# Altium PCB PCB1.PcbDoc
Units mil, origin at the board's own origin, x right, y up, seen from the top; angles counter-clockwise.
Board outline 730 x 1700 mil, 4 copper layers (Top Layer, VCC, GND, Bottom Layer), stack 23.756 mil thick; 25 components, 43 nets, 165 pads, 74 vias.
Unrouted connection lines stored in the file: 22.
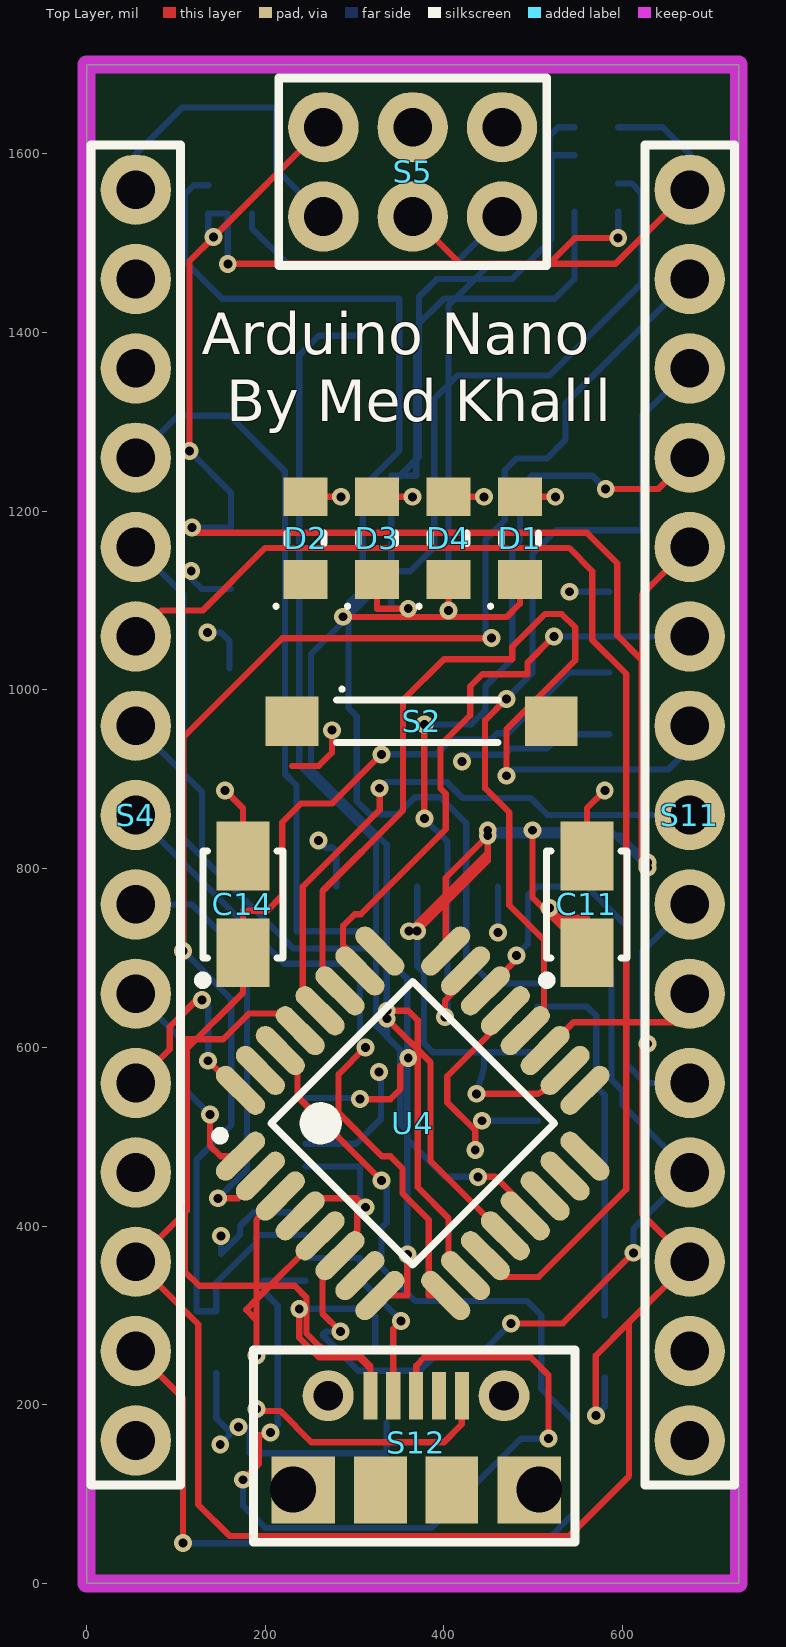
[diagram p0: Top Layer view]
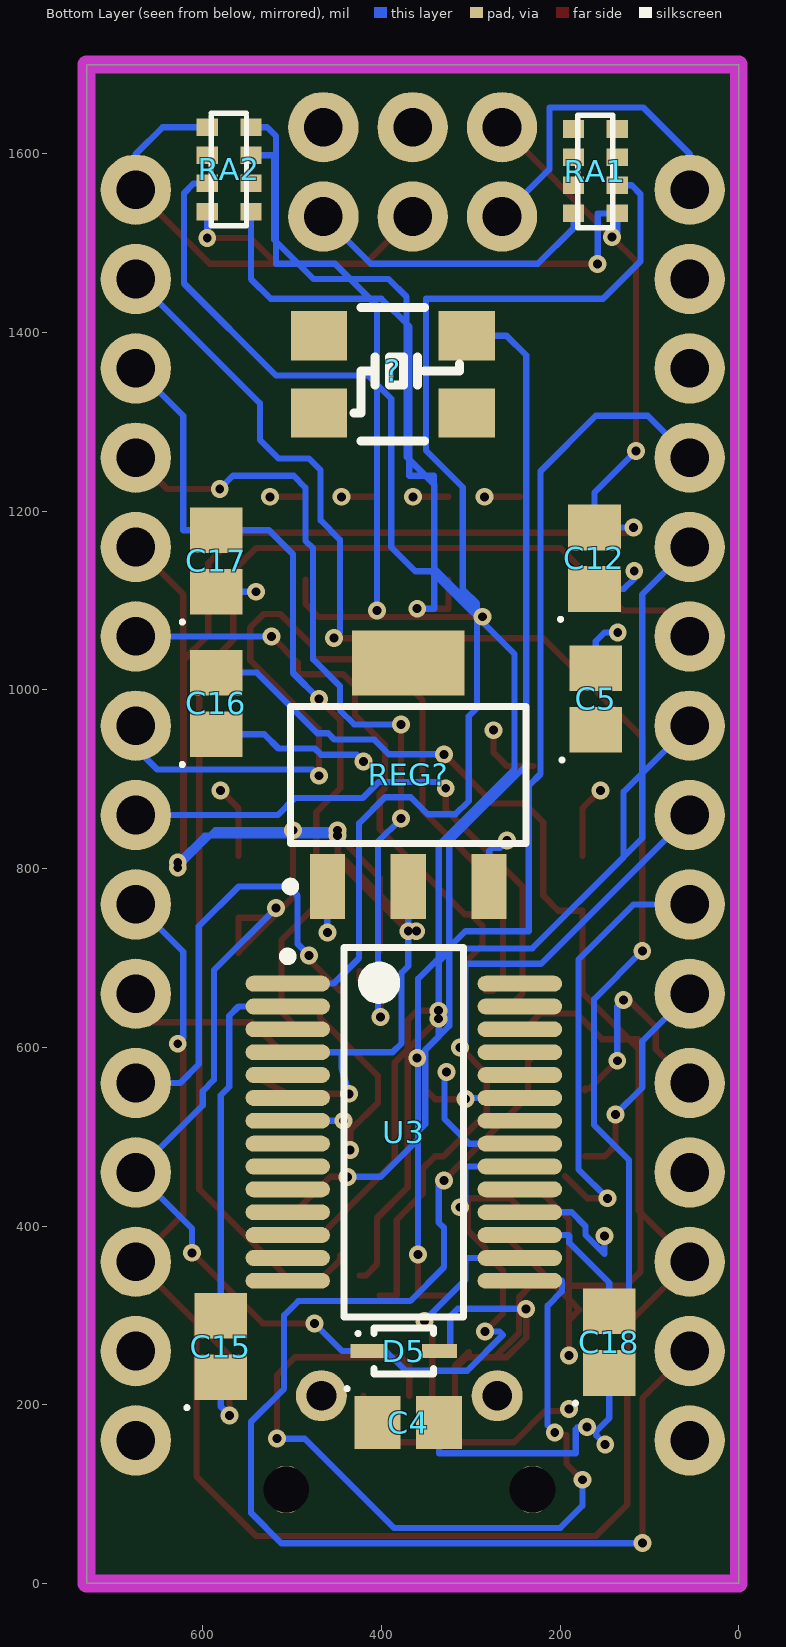
[diagram p1: Bottom Layer view, seen from below]
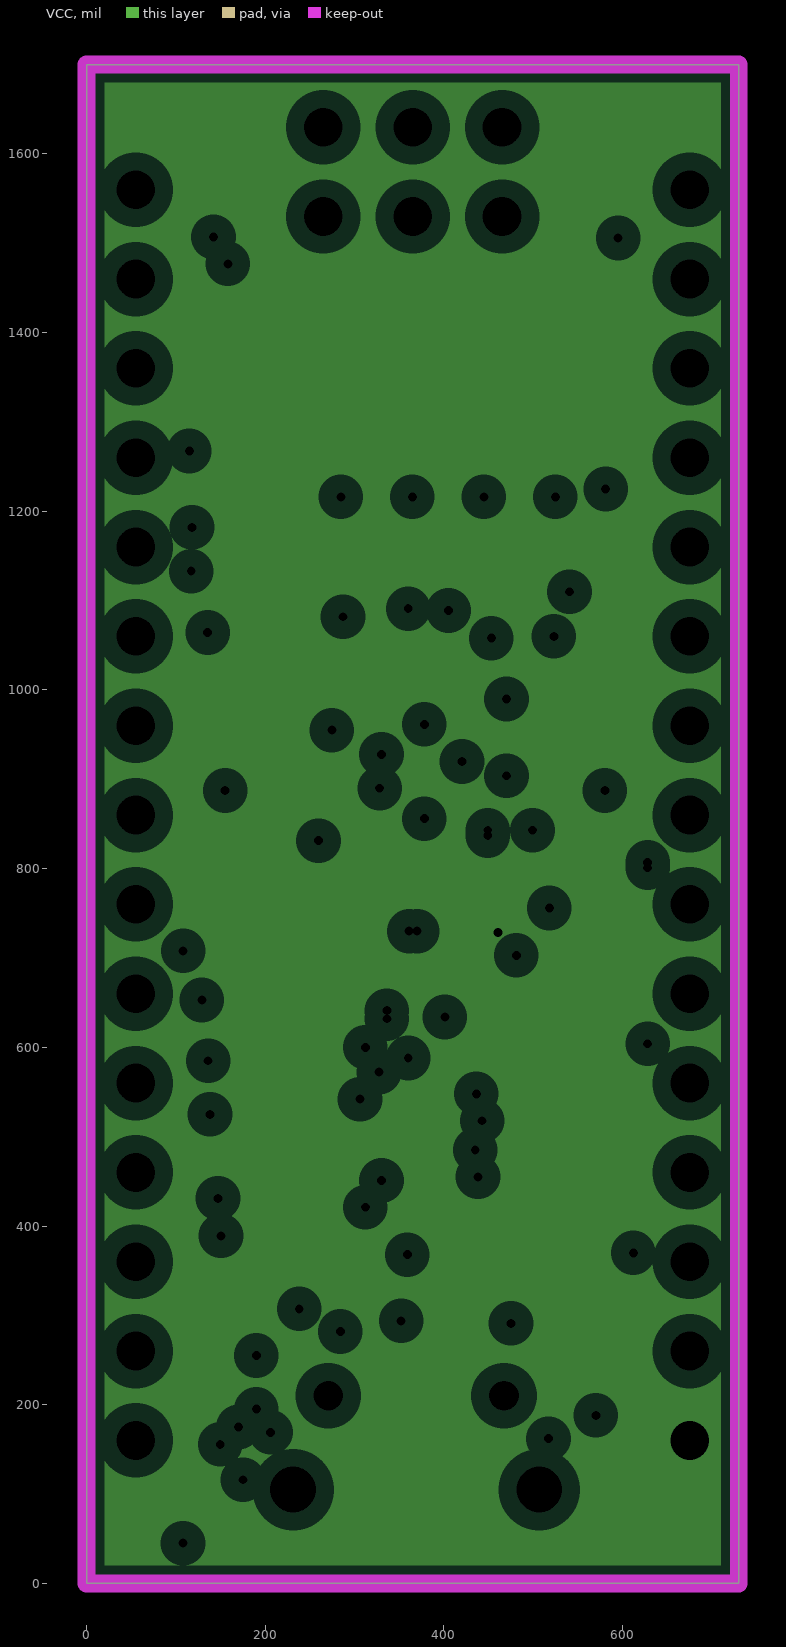
[diagram p2: VCC, clearances drawn from the general rule]
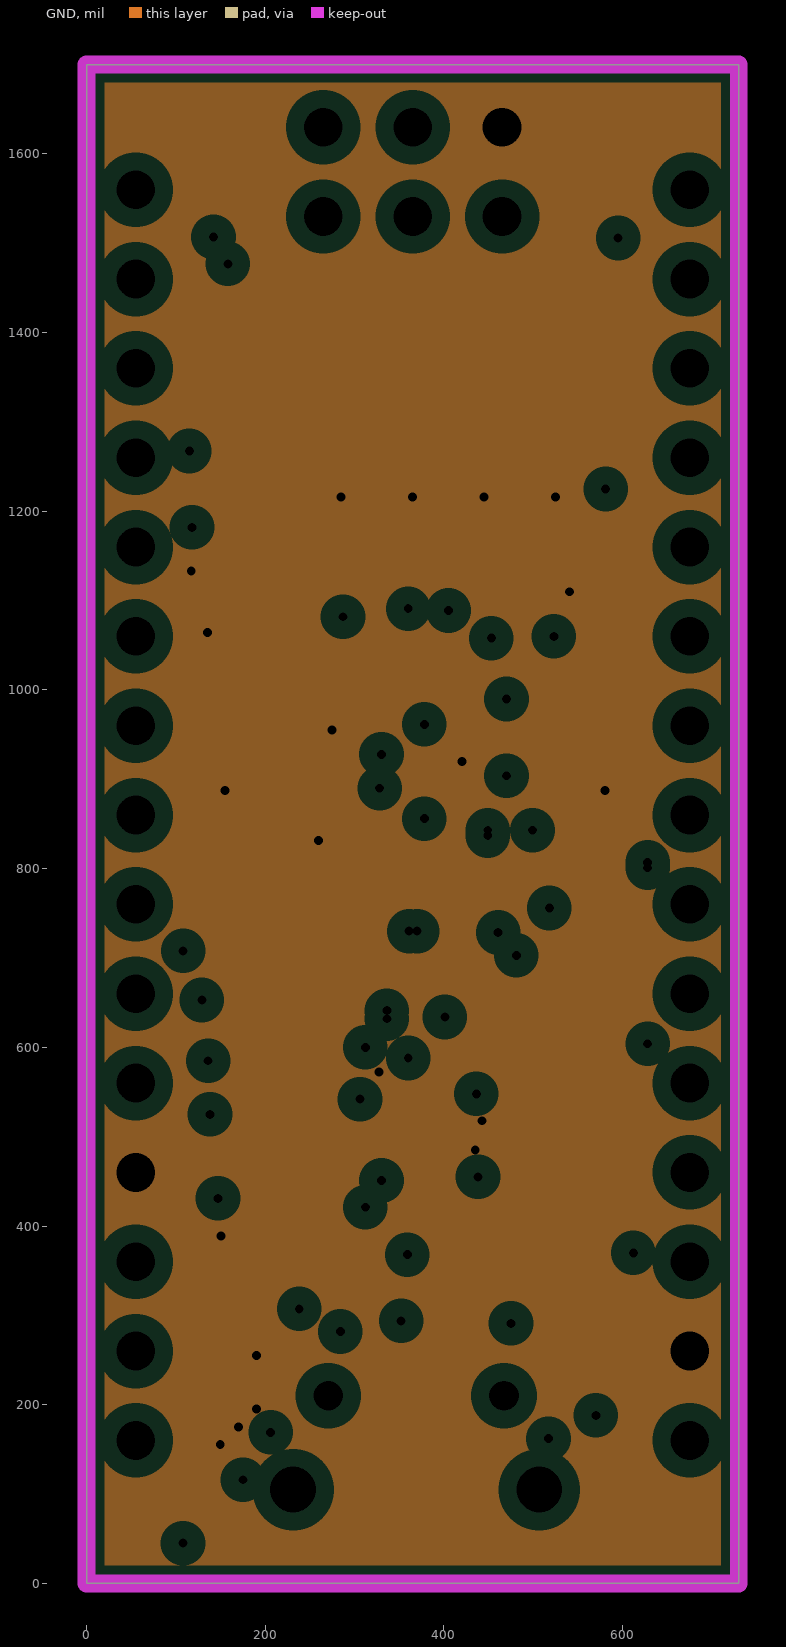
[diagram p3: GND, clearances drawn from the general rule]

## Layer stack, top to bottom
Top Solder: solder mask 0.4, Solder Resist, Dk 3.5
Top Layer: signal copper 1.4
Dielectric 2: prepreg 2.8, PP-006, Dk 4.1
VCC: plane copper 1.378, net Vin
Dielectric 1: dielectric 12.6, FR-4, Dk 4.8
GND: plane copper 1.378, net GND
Dielectric 3: prepreg 2.8, PP-006, Dk 4.1
Bottom Layer: signal copper 1.4
Bottom Solder: solder mask 0.4, Solder Resist, Dk 3.5

## Board outline
0,0 0,1700 730,1700 730,0

## Design rules (kind name [scope] priority, off if disabled: settings)
Clearance [All] p1: gap=10 ignorepadtopadclearanceinfootprint=FALSE
PlaneClearance [All] p1: clearance=20
PlaneConnect [All] p1: planeconnectstyle=Relief reliefexpansion=20 reliefentries=4 reliefconductorwidth=10 reliefairgap=10
PolygonConnect [All] p1: connectstyle=Relief reliefconductorwidth=10 reliefentries=4 polygonreliefangle="90 Angle" airgapwidth=10
RoutingVias [All] p1: holewidth=10 width=20 viastyle="Through Hole" minholewidth=10 minwidth=20 maxholewidth=10 maxwidth=20
SMDNeckDown [All] p1: percent=50.000
SolderMaskExpansion [All] p1: expansion=4 istentingtop=FALSE
SupplyNets "Schematic Supply Nets_5" [InNet('+5V')] p1: voltage=0.000
SupplyNets "Schematic Supply Nets_4" [InNet('VUSB')] p2: voltage=0.000
SupplyNets "Schematic Supply Nets_3" [InNet('3V3')] p3: voltage=0.000
SupplyNets "Schematic Supply Nets_2" [InNet('Vin')] p4: voltage=0.000
SupplyNets "Schematic Supply Nets_1" [InNet('BLED')] p5: voltage=0.000
SupplyNets "Schematic Supply Nets" [InNet('GND')] p6: voltage=0.000
Width [All] p1: maxlimit=7 minlimit=7 preferedwidth=7 minimp=50.000000 maximp=50.000000 favimp=50.000000
28 further rules are at their usual default settings.

## Components (designator, comment, footprint, x,y, rotation, side; value= is the part's Value field where it differs from the comment)
? "Aker 16MHz Crystal SMT" "Aker S5C Crystal" 470,1310 r0 bottom value=16MHz
C4 "C0805C180J5GACTU" CAPCP2012X09N 370,180 r180 bottom
C5 "C0805C180J5GACTU" CAPCP2012X09N 160,990 r90 bottom
C11 "Capacitor SMT Tantalum" "CASE A - 3216X18" 560,760 r90 top value=4.7µF
C12 "100nF Ceramic Multilayer Capacitor_1" CAPCP2012X09N 161.59,1147.55 r90 bottom
C14 "Capacitor SMT Tantalum" "CASE A - 3216X18" 175,760 r90 top value=4.7µF
C15 "C0805C180J5GACTU" CAPCP2012X09N 580,265 r90 bottom
C16 "100nF Ceramic Multilayer Capacitor_1" CAPCP2012X09N 585,985 r90 bottom
C17 "100nF Ceramic Multilayer Capacitor_1" CAPCP2012X09N 585,1144.45 r90 bottom
C18 "100nF Ceramic Multilayer Capacitor_1" CAPCP2012X09N 145,270 r90 bottom
D1 "Kingbright Blue LED, 60 mcd 120 ° 0805" LED1913X12NBLUE 485,1170 r90 top
D2 "Kingbright Red LED, 100 mcd 120 ° 0805" LED1913X12NRED 245,1170 r90 top
D3 "Kingbright Green LED, 70 mcd 120 ° 0805" LED1913X12NGREEN 325,1170 r90 top
D4 "Kingbright Orange LED, 200 mcd 120 ° 0805" LED1913X12NYEL/ORANGE 405,1170 r90 top
D5 "Panasonic DB2J20900L Schottky Diode, 0.5A, 20V, 2.4ns, 2-Pin SMini2 F5 B" DIOM1712X07N 375,260 r180 bottom
RA1 "1k +- 5% SMT Resistor Array" "1206 RA" 180,1533.5 r90 bottom
RA2 "680+- 5% SMT Resistor Array" "1206 RA" 590,1535.51 r90 bottom
REG? "" SOT230P700X180-4N 370,905 r90 bottom
S2 "Button Tactile Switch, NO 0.05 A 0.8mm" Button8014X17N 370,965 r0 top
S4 "connector;str header;single row;.1 cont centers;.095 tail;gold or gtx;36 contact" Header 55,160 r90 top
S5 "Programming Headers Dual Row" "ISP HEADER" -430,2085 r0 top
S11 "connector;str header;single row;.1 cont centers;.095 tail;gold or gtx;36 contact" Header 675,160 r90 top
S12 "NewMolex Right Angle SMT Female Type B Micro USB Connector, 30 V ac, 1.8A" MicroUSB 320.39,210 r0 top
U3 "FT232RL, Universal Asynchronous Receiver & Transmitter 3MBd, 28-Pin, SSOP" SOP65P780X200-28N 375,505 r180 bottom
U4 "ATMEGA328P-AU" TQFP80P900X900X120-32N 365,515 r45 top

## Footprints (in the part's own frame and the unit in brackets; to place one, negate y for a bottom-side part, rotate by r counter-clockwise, add the part's x,y. Pads: shape width x height; smd on the part's side, far side on the other; paste and mask are expansions set on the pad)
"1206 RA" [mm]
  rect 0.5x0.6 smd: 1(0,0.127) 2(0.8,0.127) 3(1.6,0.127) 4(2.4,0.127) 5(0,-1.118) 6(0.8,-1.118) 7(1.6,-1.118) 8(2.4,-1.118)
  silkscreen extent -0.41,-0.99 2.79,0.01, body extent -0.41,-1.31 2.79,0.29, height 0.5
"Aker S5C Crystal" [mm]
  rect 1.6x1.4 smd: 1(0,0) 2(-4.2,0) 3(0,-2.2) 4(-4.2,-2.2)
  round 0.254 on Bottom Overlay: 5(-3,-2.4)
  silkscreen extent -4,-3 -1,0.8, body extent -4.7,-2.8 0.5,0.6, height 1
Button8014X17N [mm] "Chip Inductor, 2-Leads, Body 8.00x1.40mm, IPC Medium Density"
  rect 1.5x1.4 smd: 1(-3.556,0) 2(3.81,0)
  silkscreen extent -2.3,-0.6 2.3,0.96, body extent -3.79,-1.92 4.21,1.78, height 2.5
CAPCP2012X09N [mm] "Chip Capacitor, 2-Leads, Body 2.00x1.25mm, IPC Medium Density"
  rect 1.3x1.5 smd: 1(-0.875,0) 2(0.875,0)
  silkscreen extent -1.79,0.91 -1.69,1.01, body extent -1.05,-0.57 0.95,0.68, height 0.78
"CASE A - 3216X18" [mm] "Molded Capacitor, 2-Leads, Body 3.2x1.6mm, IPC Medium Density"
  rect 1.95x1.5 smd: 1(-1.375,0) 2(1.375,0)
  silkscreen extent -2.28,-1.14 1.52,1.27, body extent -1.52,-0.76 1.65,0.84, height 1.77
DIOM1712X07N [mm] "Molded Diode, 2-Leads, Body 1.70x1.25mm, IPC Medium Density"
  rect 1x0.4 smd: 1(-1.016,0) 2(1.016,0)
  silkscreen extent -1.35,-0.65 0.85,0.65, body extent -0.9,-0.45 0.9,0.45, height 0.8
Header [mm] "SIL Header"
  round 2 hole 1.1: 1(0,0) 2(2.54,0) 3(5.08,0) 4(7.62,0) 5(10.16,0) 6(12.7,0) 7(15.24,0) 8(17.78,0) 9(20.32,0) 10(22.86,0) 11(25.4,0) 12(27.94,0) 13(30.48,0) 14(33.02,0) 15(35.56,0)
  silkscreen extent -1.27,-1.27 36.83,1.27, body extent -1.33,-1.35 36.93,1.35, height 8.6
"ISP HEADER" [mm] "SIL Header for programming"
  round 2 hole 1.1: 1(17.653,-14.097) 2(17.653,-11.557) 3(20.193,-14.097) 4(20.193,-11.557) 5(22.733,-14.097) 6(22.733,-11.557)
  silkscreen extent 16.38,-15.49 24,-10.16, body extent 16.38,-15.37 24,-10.29, height 8
LED1913X12NBLUE [mm] "LED 2-Leads, Body 1.90x1.32mm, IPC Medium Density"
  rect 1.1x1.25 smd: 1(-1.175,0) 2(1.175,0)
  silkscreen extent -1.99,-0.53 0.15,0.89, body extent -1,-0.62 1.02,0.62, height 1.1
LED1913X12NGREEN [mm] "LED 2-Leads, Body 1.90x1.32mm, IPC Medium Density"
  rect 1.1x1.25 smd: 1(-1.175,0) 2(1.175,0)
  silkscreen extent -1.99,-0.53 0.15,0.89, body extent -1.01,-0.62 1.01,0.63, height 1.1
LED1913X12NRED [mm] "LED 2-Leads, Body 1.90x1.32mm, IPC Medium Density"
  rect 1.1x1.25 smd: 1(-1.175,0) 2(1.175,0)
  silkscreen extent -1.99,-0.53 0.15,0.89, body extent -1.02,-0.43 1.04,0.47, height 0.85
LED1913X12NYEL/ORANGE [mm] "LED 2-Leads, Body 1.90x1.32mm, IPC Medium Density"
  rect 1.1x1.25 smd: 1(-1.175,0) 2(1.175,0)
  silkscreen extent -1.99,-0.53 0.15,0.89, body extent -1.01,-0.62 1.01,0.63, height 1.1
MicroUSB [mm] "MicroUSB  Molex 5Pin"
  rect 0.4x1.35 smd: 1(-0.07,0) 2(0.58,0) 3(1.23,0) 4(1.88,0) 5(2.53,0)
  rrect50% 0.6x1.3 hole 1.3: ""(-2.27,-2.667) ""(-2.27,-2.667) ""(4.73,-2.667)
  rect 1.8x1.9 smd: ""(-1.98,-2.678) ""(4.45,-2.678)
  round 1.45 hole 0.85: ""(-1.27,0) ""(3.73,0)
  rect 1.5x1.9 smd: ""(0.218,-2.678) ""(2.242,-2.678)
  silkscreen extent -3.39,-4.17 5.75,1.3, body extent -2.83,-5.32 5.37,0.11, height 2.68
SOP65P780X200-28N [mm] "SOP, 28-Leads, Body 10.20x5.30mm, Pitch 0.65mm, IPC Medium Density"
  oval 2.4x0.45 smd: 1(-3.3,4.225) 2(-3.3,3.575) 3(-3.3,2.925) 4(-3.3,2.275) 5(-3.3,1.625) 6(-3.3,0.975) 7(-3.3,0.325) 8(-3.3,-0.325) 9(-3.3,-0.975) 10(-3.3,-1.625) 11(-3.3,-2.275) 12(-3.3,-2.925) 13(-3.3,-3.575) 14(-3.3,-4.225) 15(3.3,-4.225) 16(3.3,-3.575) 17(3.3,-2.925) 18(3.3,-2.275) 19(3.3,-1.625) 20(3.3,-0.975) 21(3.3,-0.325) 22(3.3,0.325) 23(3.3,0.975) 24(3.3,1.625) 25(3.3,2.275) 26(3.3,2.925) 27(3.3,3.575) 28(3.3,4.225)
  silkscreen extent -3.43,-5.25 1.7,5.25, body extent -3.91,-5.1 3.91,5.1, height 2
SOT230P700X180-4N [mm] "SOT223, 4-Leads, Body 6.50x7.00mm (avg), Pitch 2.30mm, IPC Medium Density"
  rect 1.85x1 smd: 1(-3.175,2.3) 2(-3.175,0) 3(-3.175,-2.3)
  rect 1.85x3.2 smd: 4(3.175,0)
  silkscreen extent -3.3,-3.35 1.95,3.48, body extent -3.8,-3.12 3.29,3.38, height 1.65
TQFP80P900X900X120-32N [mm] "TQFP, 32-Leads, Body 7.00x7.00mm, Pitch 0.80mm, IPC Medium Density"
  oval 1.75x0.55 smd: 1(-4.125,2.8) 2(-4.125,2) 3(-4.125,1.2) 4(-4.125,0.4) 5(-4.125,-0.4) 6(-4.125,-1.2) 7(-4.125,-2) 8(-4.125,-2.8) 17(4.125,-2.8) 18(4.125,-2) 19(4.125,-1.2) 20(4.125,-0.4) 21(4.125,0.4) 22(4.125,1.2) 23(4.125,2) 24(4.125,2.8)
  oval 0.55x1.75 smd: 9(-2.8,-4.125) 10(-2,-4.125) 11(-1.2,-4.125) 12(-0.4,-4.125) 13(0.4,-4.125) 14(1.2,-4.125) 15(2,-4.125) 16(2.8,-4.125) 25(2.8,4.125) 26(2,4.125) 27(1.2,4.125) 28(0.4,4.125) 29(-0.4,4.125) 30(-1.2,4.125) 31(-2,4.125) 32(-2.8,4.125)
  silkscreen extent -4.25,-2.85 2.85,3.75, body extent -4.44,-4.5 4.56,4.5, height 1.6

## Part data
?: library part "Aker  C5S-16.000-12-3030-X", "Aker S5C SMT Crystal", Frequency Stability=+/-30ppm, Load Capacitance=12pF, Manufacturer=Aker, Manufacturer Part #=C5S-16.000-12-3030-X, Package="3.2x5mm SMD", Creator="R Kanjee", HelpURL=http://za.rs-online.com/web/p/crystal-units/6719488/, RS="RS 671-9488", RS Stock Nr.=671-9488, Supplier=RS
C4 C5: library part "18pF Ceramic Multilayer Capacitor, 50 V dc C0G Dielectric ±5% SMD", "18pF Ceramic Multilayer Capacitor, 50 V dc C0G Dielectric ±5% SMD", Capacitance=15pF, Manufacturer=Kemet, Package=0805, Voltage=50V, Creator="Ritesh Kanjee", Datasheet URL=http://za.rs-online.com/web/p/ceramic-multilayer-capacitors/6480935/?searchTerm=C0805C180J5GACTU&relevancy-data=636F3D3226696E3D4931384E4B6E6F776E41734D504E266C753D656E266D6D3D6D61746368616C6C7061727469616C26706D3D5E5B5C707B4C7D5C707B4E647D2D2C2F255C2E5D2B2426706F3D313326736E3D592673743D4D414E5F504152545F4E554D4245522677633D424F5448267573743D4330383035433138304A35474143545526, Date Created="18 February 2015", RS Stock No.=648-0935
C11 C14: library part "4.7µF Tant RS 496-3545", "Capacitor,tantalum,SMT,16V,4.7uF,10%,A-case", Package=3216-18, Tolerance=10%, Voltage=16V, ComponentLink1Description="Supplier Website", ComponentLink1URL=http://za.rs-online.com/web/search/searchBrowseAction.html?method=getProduct&R=4963545, ComponentLink2Description="RS Data sheet", ComponentLink2URL=http://docs-europe.origin.electrocomponents.com/webdocs/04ed/0900766b804ed4cc.pdf, LatestRevisionDate=28-April-2010, Part Originator="H Theron", Publisher=DPSS, RS Stock Nr.=496-3545
C12 C16 C17 C18: "AVX 0805 Standard 100nF Ceramic Multilayer Capacitor, 50 V dc X7R Dielectric ±10% SMD", Capacitance=100nF, Manufacturer=AVX, Package=0805, Voltage=50V, Creator="Ritesh Kanjee", Datasheet URL=http://za.rs-online.com/web/p/ceramic-multilayer-capacitors/4646688/, Date Created="18 February 2015", RS Stock No.=464-6688
C15: library part "18pF Ceramic Multilayer Capacitor, 50 V dc C0G Dielectric ±5% SMD", "18pF Ceramic Multilayer Capacitor, 50 V dc C0G Dielectric ±5% SMD", Capacitance=18pF, Manufacturer=Kemet, Package=0805, Voltage=50V, Creator="Ritesh Kanjee", Datasheet URL=http://za.rs-online.com/web/p/ceramic-multilayer-capacitors/6480935/?searchTerm=C0805C180J5GACTU&relevancy-data=636F3D3226696E3D4931384E4B6E6F776E41734D504E266C753D656E266D6D3D6D61746368616C6C7061727469616C26706D3D5E5B5C707B4C7D5C707B4E647D2D2C2F255C2E5D2B2426706F3D313326736E3D592673743D4D414E5F504152545F4E554D4245522677633D424F5448267573743D4330383035433138304A35474143545526, Date Created="18 February 2015", RS Stock No.=648-0935
D1: Color=Blue, Forward Voltage=3.2V, Manufacturer=KingBright, Manufacturer Part No.=KP-2012PBC-A, Creator="Ritesh Kanjee", Datasheet URL=http://za.rs-online.com/web/p/visible-leds/4663784/, Date Created="18 February 2015", RS Stock No.=466-3784
D2: Color=RED, Forward Voltage=1.85V, Manufacturer=KingBright, Manufacturer Part No.=KP-2012SRC-PRV, Creator="Ritesh Kanjee", Datasheet URL=http://za.rs-online.com/web/p/visible-leds/4663813/, Date Created="18 February 2015", RS Stock No.=466-3813
D3: Color=Green, Forward Voltage="2.1 V", Manufacturer=KingBright, Manufacturer Part No.=KP-2012MGC, Creator="Ritesh Kanjee", Datasheet URL=http://za.rs-online.com/web/p/visible-leds/4663778/, Date Created="18 February 2015", RS Stock No.=466-3778
D4: Color=Orange, Forward Voltage=1.85V, Manufacturer=KingBright, Manufacturer Part No.=KP-2012SEC, Creator="Ritesh Kanjee", Datasheet URL=http://za.rs-online.com/web/p/visible-leds/4663790/, Date Created="18 February 2015", RS Stock No.=466-3790
D5: library part "Schottky Diode, 0.5A, 20V, 2.4ns, 2-Pin SMini2 F5 B", Manufacturer=Panasonic, Manufacturer Part No.=DB2J20900L, Maximum Continuous Forward Current=0.5A, Peak Reverse Repetitive Voltage=20V, Created By="R Kanjee", Datasheet=http://docs-europe.electrocomponents.com/webdocs/1398/0900766b813986b3.pdf, Date Created="1 March 2015", RS Stock No.=713-2703
RA1: "1k +- 5% SMT Resistor Array 4 Res", Manufacturer=Bourns, Manufacturer Part No.=CAY16-102J4LF, Creator="R Kanjee", Date Created="25 February 2015", RS Stock No.=552-5579, Wattage=0.25W
RA2: library part "680 +- 5% SMT Resistor Array 4 Res 1206", "680 +- 5% SMT Resistor Array 4 Res 1206", Manufacturer=Bourns, Manufacturer Part No.=CAY16-681J4LF, Creator="R Kanjee", Date Created="25 February 2015", RS Stock No.=552-5579, Wattage=0.25W
REG?: library part LM1117MP-5.0, "LM1117MP-5.0/NOPB, Low Dropout Voltage Regulator, 1.5A, 5 V ±1%, 4-Pin SOT-223", Manufacturer="Texas Instruments", Maximum Input Voltage=15V, Output Voltage=5V, Supply Current=1.5Amps, Created By="R Kanjee", Datasheet URL=http://za.rs-online.com/web/p/low-dropout-voltage-regulators/5339583/, Date Created="26 February 2015", RS Stock No.=533-9583
S2: Manufacturer="C & K", Manufacturer Part No.=B3F1000, Creator="R Kanjee", Date Created="25 February 2015", RS Stock No.=516-255, State="Normaly Open"
S4 S11: library part "Single row; PCB headers", Current Rating="3Amps Continuous", Manufacturer=FCI, Manufacturer Part No.=68000-236HLF, Created By="R Kanjee", Date Created="1 March 2015", RS Stock No.=2509565626
S5: library part "Programming ISP, Programming Headers Dual Row", Current Rating="3Amps Continuous", Manufacturer=FCI, Manufacturer Part No.=68000-236HLF, Created By="R Kanjee", Date Created="1 March 2015", RS Stock No.=2509565626
S12: library part "Micro USB Connector, 30 V ac, 1.8A", Manufacturer=Molex, Manufacturer Part No.=105017-0001, Max Current=1.8A, Max Voltage=30V, Creator="R Kanjee", Datasheet URL=http://za.rs-online.com/web/p/micro-usb-connectors/8486764/, Date Created="28 February 2015", RS Stock No=848-6764
U3: library part "FT232RL USB to UART, Universal Asynchronous Receiver & Transmitter 3MBd, 28-Pin, SSOP", Manufacturer="FTDI Chip", Manufacturer Part No.=FT232RL, Creator="R Kanjee", Date Created="03 March 2015", Pin Count=28, RS Stock No.=406-580
U4: "ATMEGA328P-AU, 8 bit AVR Microcontroller 20MHz 1 kB, 32 kB Flash, 2 kB RAM, I2C 32-Pin TQFP", Company="Lumina Inova", Created By="Ritesh Kanjee", Datasheet URL=http://docs-europe.electrocomponents.com/webdocs/0db4/0900766b80db4deb.pdf, Date Created="14 February 2015", RS Stock No.=696-3092

## Via types
v1: diameter 20, hole 10, Top Layer to Bottom Layer, 74 vias

## Nets (pads, with @x,y where several pads share a name; then routed paths per layer and width w, separated by ;. In a path a pad name is that pad's centre, name@x,y a point inside that pad or via, vN(x,y) a via of type N, cw(c..) or ccw(c..) an arc to the next point about the centre after c; other vN are vias at no path point)
3V3: C18.2 S11.14 U3.17 | length 1771.9
  Top Layer w7: v1(108,708) 108,947 219,1058 v1(453,1058)
  Bottom Layer w7: v1(108,708) 162,654 162,513 123,474 123,304.45 C18.2 145,336.26 189.78,381.05 189.78,388.78 190.84,389.84 U3.17 ; v1(453,1058) 446.49,1064.51 446.49,1168.39 468.11,1190 468.11,1246.12 481,1259.01 515.01,1259.01 536,1280 536,1321 S11.14
A0: S11.12 U4.23 | length 956.8
  Top Layer w7: v1(378,856) v1(378,961.5) ; v1(401,634) 401,652.22 424.16,675.38 U4.23 ; v1(581,1225) 640,1225 S11.12
  Bottom Layer w7: v1(378,856) 404,830 404,637 v1(401,634) ; v1(378,961.5) 430.5,961.5 446.49,977.49 446.49,1004.49 476.5,1034.5 476.5,1158.54 485.11,1167.14 485.11,1226.61 498.26,1239.76 566.24,1239.76 v1(581,1225)
A1: S11.11 U4.24 | length 717.6
  Top Layer w7: U4.24 401.89,789.89 v1(449,837) ; v1(628,807) 622,813 622,1107 S11.11
  Bottom Layer w7: v1(449,837) 598,837 v1(628,807)
A2: S11.10 U4.26 | length 670.7
  Top Layer w7: U4.26 305.84,695.65 287,714.49 287,736 300,749 307,749 402,844 402,884 396,890 396,938 429.5,971.5 429.5,1004 443,1017.5 493.5,1017.5 493.5,1030.5 v1(523,1060)
  Bottom Layer w7: v1(523,1060) S11.10
A3: S11.9 U4.27 | length 1063.7
  Top Layer w7: U4.27 275.11,663.24 264,674.35 264,775 354,865 354,988.5 400,1034.5 476.5,1034.5 476.5,1048.5 513,1085 532,1085 547,1070 547,1033.06 470,956.06 v1(470,904)
  Bottom Layer w7: v1(470,904) 477.02,911.02 651,911.02 675,935.02 S11.9
A4: S11.8 U4.28 | length 657.9
  Top Layer w7: U4.28 242,660.27 242,780 328,866 v1(328,890)
  Bottom Layer w7: v1(328,890) 335,897 403.04,897 420.93,879.11 496.89,879.11 516,860 S11.8
A5: C15.1 RA1.1 S4.3 S5.5 S11.3 S11.7 U4.29 | length 2464.4
  Top Layer w7: U4.29 239.03,620.97 222,638 182,638 153,609 112,609 112,417 S4.3 124.87,290.13 124.87,88.13 160,53 540,53 607.08,120.08 607.08,292.08 ; v1(570,188) 570,255 607.08,292.08 ; v1(628,604) 622,598 622,413 S11.3 607.08,292.08
  Bottom Layer w7: RA1.1 185,1517 225,1477 412,1477 S5.5 ; v1(570,188) 580,198 C15.1 ; v1(628,604) 622,610 622,707 S11.7
A6: S11.6 U4.19 | length 206.7
  Top Layer w7: U4.19 545,628.19 675,628.19 S11.6
A7: S11.5 U4.22 | length 493.2
  Top Layer w7: U4.22 481,697.81 v1(481,703)
  Bottom Layer w7: v1(481,703) 494,716 494,770 504,780 560,780 604.5,735.5 604.5,581 625.5,560 S11.5
AREF: C17.2 S11.13 U4.20 | length 928.5
  Top Layer w7: v1(470,990) 446,966 446,890 473,863 473,759 512,720 512,639.73 U4.20
  Bottom Layer w7: v1(470,990) 499,1019 499,1152 525.9,1178.9 C17.2 622,1178.9 622,1307 S11.13
BLED: C11.1 C12.2 D5.1 RA1.5 RA2.1 REG?.2 S5.2 S11.4 U3.4 U3.20 U4.4 U4.6 U4.18 | length 4504.9
  Top Layer w7: v1(115,1267.59) 115,1480 v1(142,1507) S5.2 ; v1(118,1182) 118,1176 560,1176 594,1142 594,1061.13 621,1034.13 621,801 v1(628,801) ; v1(158,1477) 518,1477 547,1506 v1(595,1506) ; U4.4 239.03,414.03 256,431 302,431 303,430 ; v1(284,282) 264,302 264,350 272,358 283.57,358 U4.6 283.57,375 303,394.43 303,430 ; v1(312,421) 303,430 ; v1(361,730) 449,818 ; v1(370,730) 449,809 449,818 ; v1(436.19,548) 504.98,548 535.51,564.02 U4.18 ; v1(449,843) 449,818 ; v1(475,291) 533,291 v1(612,370) ; v1(499,843) 499,768 C11.1@560,707 ; v1(518,756) 529,745 560,745 C11.1@560,707 ; C11.1 C11.1@560,707
  Bottom Layer w7: v1(115,1267.59) 161.59,1221 C12.2 v1(118,1182) ; v1(142,1507) 136,1513 RA1.5 158,1533.5 v1(158,1477) ; U3.20 306,466.61 306,427 v1(312,421) ; v1(284,282) 268,282 264,278 304,238 373,238 395,260 D5.1 444,260 v1(475,291) ; v1(361,730) v1@370,739 ; REG?.2 v1@370,739 ; v1(436.19,548) 444.77,576.87 444.77,594.57 ; v1(449,843) v1(499,843) 586,843 v1(628,801) ; U3.4 444.77,594.57 ; v1(518,756) 587.5,686.5 587.5,563.5 600,551 600,535 S11.4 612,397 v1(612,370) ; v1(595,1506) RA2.1 ; v1@370,739 v1(370,730) 370,691 377.5,683.5 377.5,604.71 387.64,594.57 444.77,594.57
D0/RX: RA1.2 S4.2 U4.30 | length 1425.2
  Top Layer w7: S4.2 107.87,207.13 v1(107.87,45) ; U4.30 216.76,596 224,596 236,584 236,545 v1(330,451)
  Bottom Layer w7: v1(107.87,45) 512,45 546,79 546,181 509,218 509,300 493,316 368,316 330,354 330,397.97 335.82,403.8 335.82,444.97 330,450.8 v1(330,451)
D1/TX: RA1.3 S4.1 U4.31
D2: S4.5 U4.32 | length 249.2
  Top Layer w7: S4.5 93,598 93,623 123,653 v1(129,653) ; v1(136,585) 167,554 172.22,554 U4.32
  Bottom Layer w7: v1(129,653) 136,646 v1(136,585)
D3: S4.6 U4.1 | length 243.5
  Top Layer w7: v1(138,525) 138,490.11 150,478.11 U4.1
  Bottom Layer w7: S4.6 108,607 108,555 v1(138,525)
D4: S4.7 U4.2 | length 488.4
  Top Layer w7: v1(147,431) 169.65,431 U4.2
  Bottom Layer w7: S4.7 117.5,760 179.5,698 179.5,463.5 v1(147,431)
D5: S4.8 U4.9 | length 772.5
  Top Layer w7: v1(312,600) 282,570 282,526.5 330.55,477.95 340,477.95 353.5,464.45 353.5,436.46 383,406.96 383,322.22 U4.9
  Bottom Layer w7: S4.8 221.3,693.7 306,693.7 306,606 v1(312,600)
D6: S4.9 U4.10 | length 839.1
  Top Layer w7: v1(336,641) 360,641 370.5,630.5 370.5,443.5 405,409 405,357 417.51,344.49 U4.10
  Bottom Layer w7: S4.9 129,886 129,812.96 231.26,710.7 321.3,710.7 336,696 v1(336,641)
D7: S4.10 U4.11 | length 1481.6
  Top Layer w7: S4.10 84,1089 130,1089 200,1159 540,1159 566,1133 566,1056 604,1018 604,441 506,343 465,343 446.43,361.57 U4.11
D8: S4.11 U4.12 | length 995.1
  Top Layer w7: v1(336,632) 385,583 385,472.73 U4.12
  Bottom Layer w7: S4.11 108,1107 108,833.96 231.26,710.7 321.3,710.7 336,696 v1(336,632)
D9: S4.12 U4.13 | length 1231.9
  Top Layer w7: v1(438,455) 457.41,455 490.97,421.44 U4.13
  Bottom Layer w7: S4.12 102,1307 160,1307 222,1245 222,906 235,893 235,730 306,730 359,677 359,497 401,455 v1(438,455)
D10: S4.13 U4.14
D11/MOSI: S4.14 S5.4 U4.15
D12/MISO: S4.15 S5.1 U4.16 | length 362.5
  Bottom Layer w7: S4.15 55,1600 107,1652 212,1652 212,1583 S5.1
D13/SCK: RA2.4 S5.3 S11.15 | length 498.8
  Top Layer w7: S5.3 418,1477 592,1477 S11.15
  Bottom Layer w7: RA2.4 645,1630 675,1600 S11.15
GLED: RA2.3 U3.22
GND: C4.2 C5.2 C11.2 C12.1 C14.2 C16.1 C17.1 C18.1 D1.2 D2.2 D3.2 D4.2 REG?.3 S2.1 S4.4 S5.6 S11.2 S12.5 U3.7 U3.18 U3.21 U4.3 U4.5 U4.21 | length 2275.9
  Top Layer w7: v1(155,887.52) 175,867.52 C14.2 ; v1(190,195) 190,192.98 216.52,192.98 251.54,157.96 400,157.96 420,177.96 S12.5 ; v1(190,255) 190,294.73 ; U4.3 190,406.81 190,317.73 ; 230,915 260,915 274.53,929.53 v1(274.53,955) ; D2.2 v1(284.61,1216.26) ; U4.5 190,317.73 ; D3.2 v1(364.61,1216.26) ; D4.2 v1(444.61,1216.26) ; v1(435,485) 435,507 403.76,538.24 403.76,567.8 468.7,632.74 U4.21 ; D1.2 v1(524.61,1216.26) ; C11.2 560,867.52 v1(580,887.52) ; 190,294.73 190,317.73 ; 190,294.73 178.5,306.23 190,317.73
  Bottom Layer w7: v1(117.06,1133.11) 117.06,1124.75 128.7,1113.11 C12.1 ; v1(135.47,1064.45) 150,1064.45 160,1054.45 C5.2 ; C18.1 145,184.96 159.59,170.36 159.59,165.62 v1(149.53,155.55) ; v1(150.46,389) 150.46,369 171.66,390.21 171.66,400 187.1,415.43 U3.18 ; v1(170,175) 180,175 182.44,172.56 182.44,145.5 335.55,145.5 C4.2 ; U3.21 301.7,492.2 329.5,520 329.5,570.03 v1(327.32,572.2) ; v1(259.45,831.42) 267.34,823.53 275.92,823.53 279.45,820 REG?.3 ; v1(420.1,920) 427.6,927.5 467.6,927.5 474.6,934.5 515.23,934.5 531.29,950.55 C16.1 ; v1(442.68,517.8) U3.7 ; v1(540.47,1110) C17.1
Net?_2: ?.2 C4.1
Net?_3: ?.3 C5.1
NetC15_2: C15.2 U3.2 | length 409.7
  Bottom Layer w7: U3.2 560,645.75 570.5,635.25 570.5,556 580,546.5 C15.2
NetD1_1: D1.1 RA2.5 | length 881.3
  Top Layer w7: v1(287,1082) 287.4,1081.6 470,1081.6 485,1096.6 D1.1
  Bottom Layer w7: v1(287,1082) 341.11,1136.11 341.11,1239.76 369,1239.76 369,1407 400,1438 524,1438 546,1460 RA2.5
NetD2_1: D2.1 RA2.6
NetD3_1: D3.1 RA2.7 | length 743.6
  Top Layer w7: D3.1 325,1091 v1(360,1091)
  Bottom Layer w7: v1(360,1091) 341,1091 341,1230 372,1261 372,1440 392,1460 476,1460 520,1504 520,1598.5 RA2.7
NetD4_1: D4.1 RA2.8 | length 683.4
  Top Layer w7: v1(405,1089) D4.1
  Bottom Layer w7: v1(405,1089) 405,1430 452,1477 518,1477 518,1620 528,1630 RA2.8
NetS12_2: S12.2 U3.16 | length 237.9
  Top Layer w7: S12.2 343.23,285 v1(352,293.77)
  Bottom Layer w7: U3.16 306,364.25 306,339.77 v1(352,293.77)
NetS12_3: S12.3 U3.15 | length 988
  Top Layer w7: v1(175,116) 193,134 193,166 206,166 v1(206,169) ; S12.3 368.82,243.82 378,253 497,253 517,233 v1(517,162)
  Bottom Layer w7: v1(175,116) 175,87 200,62 386,62 486,162 v1(517,162) ; v1(206,169) 214,177 214,310.78 198,326.78 198,338.66 U3.15
RLED: RA2.2 U3.23 | length 1417.6
  Top Layer w7: v1(306,542) 340,542 351,553 351,579 v1(360,588)
  Bottom Layer w7: U3.23 304.61,543.39 v1(306,542) ; v1(360,588) 336,612 336,827 251,912 251,1040 344,1133 362,1133 389,1160 389,1326 415,1352 518,1352 621,1455 621,1556.01 610,1567.01 RA2.2
RX: RA1.6 U3.1 | length 1343.9
  Bottom Layer w7: RA1.6 120,1565 110,1555 110,1480 152,1438 350,1438 350,1268 309,1227 309,1112.92 293,1096.92 293,980 302.4,970.6 302.4,875.65 317.2,860.84 348,860.84 367.16,880 396,880 425,851 425,700 453.66,671.34 U3.1
TX: RA1.7 U3.5
Vin: REG?.1 S11.1 | length 51.4
  Bottom Layer w7: v1(460.55,728.58) REG?.1
VUSB: C14.1 C16.2 D5.2 S12.1 | length 1552.7
  Top Layer w7: v1(238,307.26) 238,275 260,253 273,253 ; S12.1 317.64,240 ; v1(330,928) 275,873 240,873 219,852 219,770 202,753 175,753 C14.1 175,661 110,596 110,349 126,333 233,333 246,320 246,280 273,253 ; 273,253 302,253 ; 302,253 304.64,253 317.64,240 ; 302,253 302,259 317.64,243.36 317.64,240
  Bottom Layer w7: v1(238,307.26) 314.47,307.26 323,298.73 323,260 D5.2 ; v1(330,928) 391.6,928 408.1,944.5 452.55,944.5 459.55,951.5 471.73,951.5 539.68,1019.45 C16.2
XTAL1: ?.1 U4.7
XTAL2: ?.4 U4.8 | length 1209.2
  Top Layer w7: U4.8 359,322.22 v1(359,368)
  Bottom Layer w7: ?.4 260,1396.61 238,1374.61 238,916 324,830 324,624 351,597 351,514 359,506 v1(359,368)
pads on no net: ?.5 RA1.4 RA1.8 REG?.4 S2.2 S12. S12.4 U3.3 U3.6 U3.8 U3.9 U3.10 U3.11 U3.12 U3.13 U3.14 U3.19 U3.24 U3.25 U3.26 U3.27 U3.28 U4.17 U4.25

## Polygon pours and split planes (outlines as drawn)
Vin on VCC (split plane): 709.9,20.1 20.1,20.1 20.1,1679.9 709.9,1679.9
GND on GND (split plane): 709.9,20.1 20.1,20.1 20.1,1679.9 709.9,1679.9

## Keep-outs
Keep-Out Layer:
  the board outline again, w20

## Other copper
Top Layer:

## Silkscreen, mask and mechanical layers (free items; w line width, h text height)
Top Overlay:
  text "Arduino Nano" at 128.72,1360 h80
  text "By Med Khalil" at 156.29,1285.02 h80